# Altium PCB QFN68_DIP72_SMT_PCB.PcbDoc
Units mm, origin at the board's own origin, x right, y up, seen from the top; angles counter-clockwise.
Board outline 35 x 90 mm, 2 copper layers (Top Layer, Bottom Layer); 3 components, 68 nets, 137 pads, 25 vias.
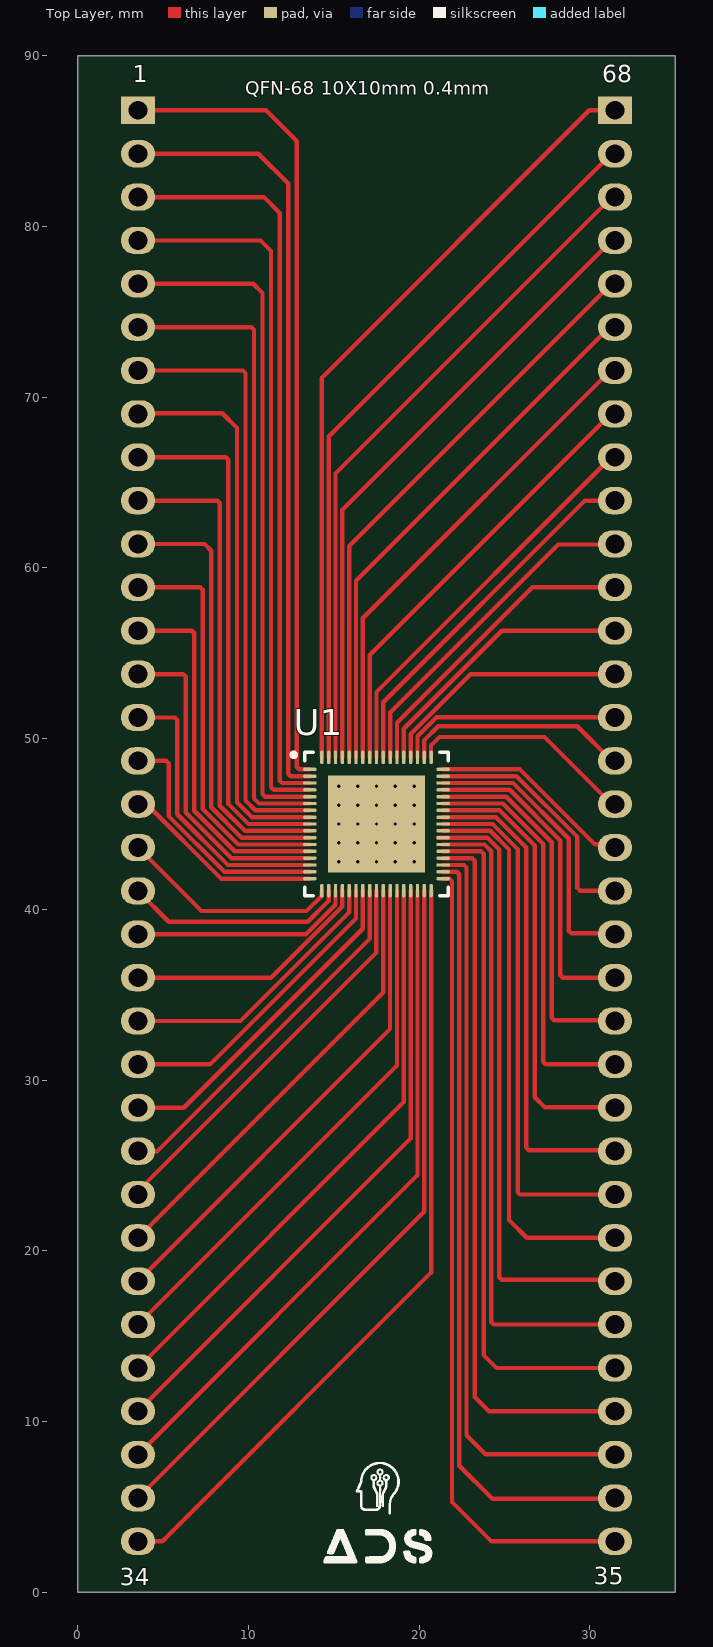
[diagram p0: Top Layer view]
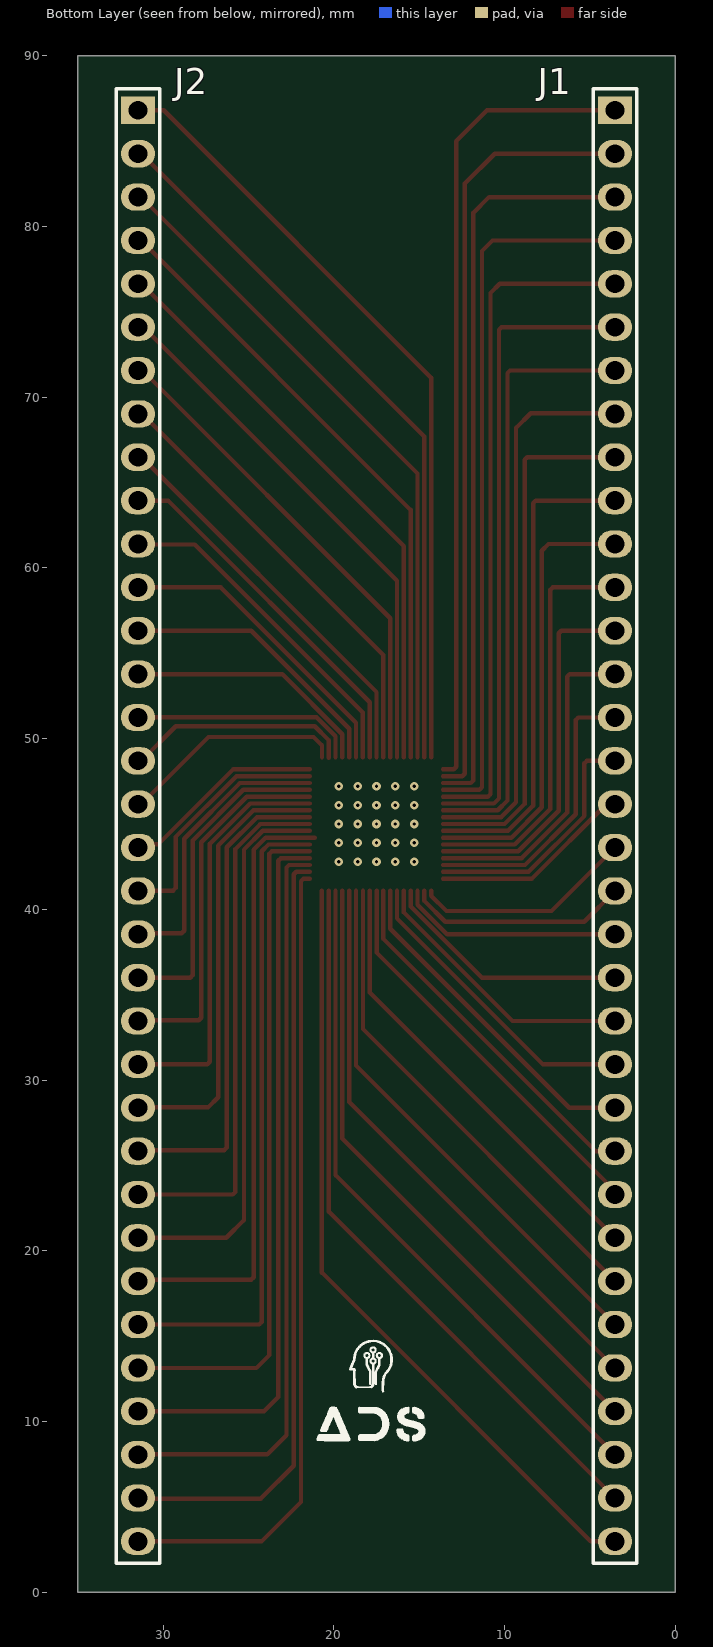
[diagram p1: Bottom Layer view, seen from below]

## Layer stack, top to bottom
Top Solder: solder mask 0.0102, Solder Resist, Dk 3.5
Top Layer: signal copper 0.0356
Dielectric 1: dielectric 0.32, FR-4, Dk 4.8
Bottom Layer: signal copper 0.0356
Bottom Solder: solder mask 0.0102, Solder Resist, Dk 3.5

## Board outline
0,0 35,0 35,90 0,90

## Design rules (kind name [scope] priority, off if disabled: settings)
Clearance Clearance_1 [All] p1 off: gap=0.254 ignorepadtopadclearanceinfootprint=FALSE except(0: Arc-Hole Track-Hole SMDPad-Hole THPad-Hole Via-Hole Fill-Hole Poly-Hole Region-Hole Text-Hole)
Clearance Clearance_QFN68 [All] p2 off: gap=0 ignorepadtopadclearanceinfootprint=TRUE
Clearance [All] p3 off: gap=0.1 ignorepadtopadclearanceinfootprint=TRUE except(0: Arc-Hole Track-Hole SMDPad-Hole THPad-Hole Via-Hole Fill-Hole Poly-Hole Region-Hole Text-Hole)
PolygonConnect [All] p1: connectstyle=Relief reliefconductorwidth=0.254 reliefentries=4 polygonreliefangle="90 Angle" airgapwidth=0.254
RoutingVias [All] p1: holewidth=0.711 width=1.27 viastyle="Through Hole" minholewidth=0.711 minwidth=1.27 maxholewidth=0.711 maxwidth=1.27
SolderMaskExpansion [All] p1: expansion=0.102 istentingtop=FALSE
Width [All] p1: maxlimit=0.254 minlimit=0.254 preferedwidth=0.254
30 further rules are at their usual default settings.

## Components (designator, comment, footprint, x,y, rotation, side; value= is the part's Value field where it differs from the comment)
J1 "HEADER MALE 34PIN" HDR_MALE_1x4_2.54mm 3.53,86.8 r180 bottom
J2 "HEADER MALE 34PIN" HDR_MALE_1x4_2.54mm 31.47,86.8 r180 bottom
U1 "CY8C5888LTQ-LP097" CYP-LTX68_L 17.5,45 r0 top

## Footprints (in the part's own frame and the unit in brackets; to place one, negate y for a bottom-side part, rotate by r counter-clockwise, add the part's x,y. Pads: shape width x height; smd on the part's side, far side on the other; paste and mask are expansions set on the pad)
CYP-LTX68_L [mm] "QFN, 68-Leads, Body 8x8mm, Pitch 0.4mm, Thermal Pad 5.7x5.7mm, IPC High Density"
  oval 0.8x0.2 smd: 1(-3.9,3.2) 2(-3.9,2.8) 3(-3.9,2.4) 4(-3.9,2) 5(-3.9,1.6) 6(-3.9,1.2) 7(-3.9,0.8) 8(-3.9,0.4) 9(-3.9,0) 10(-3.9,-0.4) 11(-3.9,-0.8) 12(-3.9,-1.2) 13(-3.9,-1.6) 14(-3.9,-2) 15(-3.9,-2.4) 16(-3.9,-2.8) 17(-3.9,-3.2) 35(3.9,-3.2) 36(3.9,-2.8) 37(3.9,-2.4) 38(3.9,-2) 39(3.9,-1.6) 40(3.9,-1.2) 41(3.9,-0.8) 42(3.9,-0.4) 43(3.9,0) 44(3.9,0.4) 45(3.9,0.8) 46(3.9,1.2) 47(3.9,1.6) 48(3.9,2) 49(3.9,2.4) 50(3.9,2.8) 51(3.9,3.2)
  oval 0.2x0.8 smd: 18(-3.2,-3.9) 19(-2.8,-3.9) 20(-2.4,-3.9) 21(-2,-3.9) 22(-1.6,-3.9) 23(-1.2,-3.9) 24(-0.8,-3.9) 25(-0.4,-3.9) 26(0,-3.9) 27(0.4,-3.9) 28(0.8,-3.9) 29(1.2,-3.9) 30(1.6,-3.9) 31(2,-3.9) 32(2.4,-3.9) 33(2.8,-3.9) 34(3.2,-3.9) 52(3.2,3.9) 53(2.8,3.9) 54(2.4,3.9) 55(2,3.9) 56(1.6,3.9) 57(1.2,3.9) 58(0.8,3.9) 59(0.4,3.9) 60(0,3.9) 61(-0.4,3.9) 62(-0.8,3.9) 63(-1.2,3.9) 64(-1.6,3.9) 65(-2,3.9) 66(-2.4,3.9) 67(-2.8,3.9) 68(-3.2,3.9)
  rect 5.7x5.7 smd: 69(0,0)
  silkscreen extent -4.97,-4.2 4.2,4.2, body extent -4.05,-4.05 4.05,4.05, height 1
HDR_MALE_1x4_2.54mm [mm] "HDR FEMALE 1x6 2.54mm"
  rect 2x1.6 / inner rect 2x1.2 / far side rect 2x1.6 hole 1.1: 1(0,0)
  oval 2x1.6 / inner oval 2x1.2 / far side oval 2x1.6 hole 1.1: 2(0,-2.54) 3(0,-5.08) 4(0,-7.62) 5(0,-10.16) 6(0,-12.7) 7(0,-15.24) 8(0,-17.78) 9(0,-20.32) 10(0,-22.86) 11(0,-25.4) 12(0,-27.94) 13(0,-30.48) 14(0,-33.02) 15(0,-35.56) 16(0,-38.1) 17(0,-40.64) 18(0,-43.18) 19(0,-45.72) 20(0,-48.26) 21(0,-50.8) 22(0,-53.34) 23(0,-55.88) 24(0,-58.42) 25(0,-60.96) 26(0,-63.5) 27(0,-66.04) 28(0,-68.58) 29(0,-71.12) 30(0,-73.66) 31(0,-76.2) 32(0,-78.74) 33(0,-81.28) 34(0,-83.82)
  silkscreen extent -1.27,-85.09 1.27,1.27, body extent -1.2,-85.09 1.2,1.27, height 10.29

## Part data
J1 J2: library part 77311-101-34LF, "Headers & Wire Housings 34P STR SR TMT HDR .76 AU .425IN LENGTH", Color=Black, Current Rating=3A, Flammability Rating="UL94 V-0", Insulation Resistance=5GR, Manufacturer="Amphenol ICC / FCI", Max Operating Temperature=125°C, Max Voltage Rating (AC)=1.5kV, Min Operating Temperature=-65°C, Package Quantity=100, Supplier Part Number 1=62K8798, Category=Connectors, ComponentLink1Description=https://datasheet.ciiva.com/8050/320503-8050396.pdf?src-supplier=Element14, ComponentLink1URL=https://datasheet.ciiva.com/8050/320503-8050396.pdf?src-supplier=Element14, ComponentLink2Description=https://datasheet.ciiva.com/10116/77311-10116809.pdf?src-supplier=Avnet, ComponentLink2URL=https://datasheet.ciiva.com/10116/77311-10116809.pdf?src-supplier=Avnet, ComponentLink3Description=https://datasheet.ciiva.com/16729/77311-16729755.pdf?src-supplier=Avnet+Europe, ComponentLink3URL=https://datasheet.ciiva.com/16729/77311-16729755.pdf?src-supplier=Avnet+Europe, ComponentLink4Description=https://datasheet.ciiva.com/722/77311-722458.pdf?src-supplier=Digi-Key, ComponentLink4URL=https://datasheet.ciiva.com/722/77311-722458.pdf?src-supplier=Digi-Key, Connector Type="Male Pin", Contact Gender=Male, Contact Material=Bronze, Contact Mating Length=0.23inch, Contact Plating=Gold,GXT, Contact Post Length=2.41mm, Contact Type="Male Pin", Depth=2.4mm, Gender=Male, Housing Color=Black, Housing Material=Thermoplastic, Lead Free="Lead Free", Length=86.36mm, Manufacturer Part Number=77311-101-34LF, Material=Thermoplastic, Mount="Through Hole", Number of Contacts=34, Number of Positions=34, Number of Rows=1, Orientation=Straight, Packaging=Bulk, Pitch=2.54mm, Pricing 1="400=1,25000, 500=1,16000, 1000=1,02000 (USD)", REACH SVHC="No SVHC", RoHS=Yes, Series="BERGSTIK®, MezzSelect™, Basics+", Supplier 1=Newark, Termination=Solder, Voltage Rating=1.5kV
U1: "MCU 32-bit ARM Cortex M3 RISC 256KB Flash 1.8V/3.3V/5V 68-Pin QFN EP Tray", Case/Package=QFN, Frequency=80MHz, Manufacturer=Cypress, Max Operating Temperature=105°C, Min Operating Temperature=-40°C, Supplier Part Number 1=CY8C5888LTQ-LP097-ND, Category=Microcontrollers, ComponentLink1Description=http://www.farnell.com/datasheets/2343841.pdf?src-supplier=Farnell, ComponentLink1URL=http://www.farnell.com/datasheets/2343841.pdf?src-supplier=Farnell, ComponentLink2Description=http://www.mouser.com/ds/2/100/001-84932_PSoC_5LP_CY8C58LP_Family_Datasheet_Progr-1078031.pdf?src-supplier=Mouser, ComponentLink2URL=http://www.mouser.com/ds/2/100/001-84932_PSoC_5LP_CY8C58LP_Family_Datasheet_Progr-1078031.pdf?src-supplier=Mouser, ComponentLink3Description=http://www.cypress.com/?docID=49437&src-supplier=Digi-Key, ComponentLink3URL=http://www.cypress.com/?docID=49437&src-supplier=Digi-Key, Core Architecture=ARM, Interface=I2C,SPI,USB,UART,USART, Manufacturer Part Number=CY8C5888LTQ-LP097, Memory Size=256KB, Memory Type=FLASH, Number of I/Os=38, Oscillator Type=Internal, Packaging=Tray, Peripherals=POR,PWM,WDT,DMA,LCD,CapSense, Pricing 1="1=25,00000, 10=23,12600, 25=21,25080, 80=19,75075, 260=18,12573, 520=17,25069 (USD)", RoHS=Yes, RoHS Compliant=Yes, Stock 1=85, Supplier 1=Digi-Key

## Via types
v1: diameter 0.5, hole 0.2, Top Layer to Bottom Layer, 25 vias

## Nets (pads, with @x,y where several pads share a name; then routed paths per layer and width w, separated by ;. In a path a pad name is that pad's centre, name@x,y a point inside that pad or via, vN(x,y) a via of type N, cw(c..) or ccw(c..) an arc to the next point about the centre after c; other vN are vias at no path point)
NetJ1_1: J1.1 U1.1 | length 47.7
  Top Layer w0.254: J1.1@3.325,86.8 J1.1 11.025,86.8 12.825,85 12.825,48.349 12.974,48.2 U1.1
NetJ1_2: J1.2 U1.2 | length 45.6
  Top Layer w0.254: J1.2@3.325,84.26 J1.2 10.576,84.26 12.325,82.511 12.325,47.949 12.474,47.8 U1.2
NetJ1_3: J1.3 U1.3 | length 44
  Top Layer w0.254: J1.3@3.325,81.72 J1.3 10.905,81.72 11.825,80.8 11.825,47.549 11.974,47.4 U1.3
NetJ1_4: J1.4 U1.4 | length 42
  Top Layer w0.254: J1.4@3.325,79.18 J1.4 10.705,79.18 11.325,78.56 11.325,47.149 11.474,47 U1.4
NetJ1_5: J1.5 U1.5 | length 39.9
  Top Layer w0.254: J1.5@3.325,76.64 J1.5 10.285,76.64 10.825,76.1 10.825,46.749 10.974,46.6 U1.5
NetJ1_6: J1.6 U1.6 | length 37.9
  Top Layer w0.254: J1.6@3.325,74.1 J1.6 10.176,74.1 10.325,73.951 10.325,46.5 10.625,46.2 U1.6
NetJ1_7: J1.7 U1.7 | length 35.4
  Top Layer w0.254: J1.7 9.676,71.56 9.825,71.411 9.825,46.375 10.4,45.8 U1.7
NetJ1_8: J1.8 U1.8 | length 32.9
  Top Layer w0.254: J1.8@3.325,69.02 3.365,69.06 8.465,69.06 9.325,68.2 9.325,46.275 10.2,45.4 U1.8
NetJ1_9: J1.9 U1.9 | length 30.8
  Top Layer w0.254: J1.9 8.676,66.48 8.825,66.331 8.825,46.175 10,45 U1.9
NetJ1_10: J1.10 U1.10 | length 28.5
  Top Layer w0.254: J1.10 8.176,63.94 8.325,63.791 8.325,46.075 9.8,44.6 U1.10
NetJ1_11: J1.11 U1.11 | length 26
  Top Layer w0.254: J1.11 7.425,61.4 7.825,61 7.825,45.975 9.6,44.2 U1.11
NetJ1_12: J1.12 U1.12 | length 23.8
  Top Layer w0.254: J1.12 7.176,58.86 7.325,58.711 7.325,45.875 9.4,43.8 U1.12
NetJ1_13: J1.13 U1.13 | length 21.5
  Top Layer w0.254: J1.13 6.676,56.32 6.825,56.171 6.825,45.775 9.2,43.4 U1.13
NetJ1_14: J1.14 U1.14 | length 19.2
  Top Layer w0.254: J1.14 6.176,53.78 6.325,53.631 6.325,45.675 9,43 U1.14
NetJ1_15: J1.15 U1.15 | length 16.9
  Top Layer w0.254: J1.15 5.676,51.24 5.825,51.091 5.825,45.575 8.8,42.6 U1.15
NetJ1_16: J1.16 U1.16 | length 14.6
  Top Layer w0.254: J1.16 5.176,48.7 5.325,48.551 5.325,45.475 8.6,42.2 U1.16
NetJ1_17: J1.17 U1.17 | length 11.9
  Top Layer w0.254: J1.17 4.04,46.16 8.4,41.8 U1.17
NetJ1_18: J1.18 U1.18 | length 13
  Top Layer w0.254: J1.18@3.525,43.62 7.245,39.9 13.4,39.9 14.3,40.8 U1.18
NetJ1_19: J1.19 U1.19 | length 13
  Top Layer w0.254: J1.19@3.525,41.08 5.33,39.275 13.475,39.275 14.695,40.495 U1.19@14.695,41.095
NetJ1_20: J1.20 U1.20 | length 13.3
  Top Layer w0.254: J1.20@3.325,38.54 13.365,38.54 15.095,40.27 U1.20@15.095,41.095
NetJ1_21: J1.21 U1.21 | length 14.8
  Top Layer w0.254: J1.21@3.325,36 11.325,36 15.495,40.17 U1.21@15.495,41.095
NetJ1_22: J1.22 U1.22 | length 16.5
  Top Layer w0.254: J1.22@3.325,33.46 9.535,33.46 15.895,39.82 U1.22@15.895,41.095
NetJ1_23: J1.23 U1.23 | length 18.1
  Top Layer w0.254: J1.23@3.325,30.92 7.745,30.92 16.295,39.47 U1.23@16.295,41.095
NetJ1_24: J1.24 U1.24 | length 19.9
  Top Layer w0.254: J1.24@3.325,28.38 6.205,28.38 16.695,38.87 U1.24@16.695,41.095
NetJ1_25: J1.25 U1.25 | length 21.7
  Top Layer w0.254: J1.25@3.325,25.84 4.665,25.84 17.095,38.27 U1.25@17.095,41.095
NetJ1_26: J1.26 U1.26 | length 23.7
  Top Layer w0.254: J1.26@3.325,23.3 17.495,37.47 U1.26@17.495,41.095
NetJ1_27: J1.27 U1.27 | length 26.3
  Top Layer w0.254: J1.27@3.525,20.76 17.895,35.13 U1.27@17.895,41.095
NetJ1_28: J1.28 U1.28 | length 29
  Top Layer w0.254: J1.28@3.525,18.22 18.295,32.99 U1.28@18.295,41.095
NetJ1_29: J1.29 U1.29 | length 31.7
  Top Layer w0.254: J1.29@3.525,15.68 18.7,30.855 U1.29
NetJ1_30: J1.30 U1.30 | length 34.4
  Top Layer w0.254: J1.30@3.525,13.14 19.1,28.715 U1.30
NetJ1_31: J1.31 U1.31 | length 37.1
  Top Layer w0.254: J1.31@3.525,10.6 19.5,26.575 U1.31
NetJ1_32: J1.32 U1.32 | length 39.8
  Top Layer w0.254: J1.32@3.525,8.06 19.9,24.435 U1.32
NetJ1_33: J1.33 U1.33 | length 42.5
  Top Layer w0.254: J1.33@3.525,5.52 20.3,22.295 U1.33
NetJ1_34: J1.34 U1.34 | length 46.3
  Top Layer w0.254: J1.34@3.325,2.98 4.955,2.98 20.7,18.725 U1.34
NetJ2_1: J2.1 U1.68 | length 45.7
  Top Layer w0.254: U1.68 14.3,71.144 29.956,86.8 J2.1@31.265,86.8
NetJ2_2: J2.2 U1.67 | length 42.2
  Top Layer w0.254: U1.67 14.7,67.695 J2.2@31.265,84.26
NetJ2_3: J2.3 U1.66 | length 39.5
  Top Layer w0.254: U1.66 15.1,65.525 31.265,81.69 J2.3@31.265,81.72
NetJ2_4: J2.4 U1.65 | length 36.8
  Top Layer w0.254: U1.65 15.5,63.4 31.265,79.165 J2.4@31.265,79.18
NetJ2_5: J2.5 U1.64 | length 34.1
  Top Layer w0.254: U1.64 15.9,61.275 J2.5@31.265,76.64
NetJ2_6: J2.6 U1.63 | length 31.5
  Top Layer w0.254: U1.63 16.3,59.25 31.15,74.1 J2.6@31.265,74.1
NetJ2_7: J2.7 U1.62 | length 28.7
  Top Layer w0.254: U1.62 16.7,57.05 31.21,71.56 J2.7@31.265,71.56
NetJ2_8: J2.8 U1.61 | length 26
  Top Layer w0.254: U1.61 17.1,54.9 31.22,69.02 J2.8@31.265,69.02
NetJ2_9: J2.9 U1.60 | length 23.3
  Top Layer w0.254: U1.60 17.5,52.725 31.255,66.48 J2.9@31.265,66.48
NetJ2_10: J2.10 U1.59 | length 21.5
  Top Layer w0.254: U1.59 17.9,52.135 29.69,63.925 31.25,63.925 J2.10@31.265,63.94
NetJ2_11: J2.11 U1.58 | length 19.7
  Top Layer w0.254: U1.58 18.3,51.535 28.14,61.375 31.24,61.375 J2.11@31.265,61.4
NetJ2_12: J2.12 U1.57 | length 17.9
  Top Layer w0.254: U1.57 18.7,50.935 26.625,58.86 J2.12@31.265,58.86
NetJ2_13: J2.13 U1.56 | length 16.2
  Top Layer w0.254: U1.56 19.1,50.585 24.84,56.325 31.26,56.325 J2.13@31.265,56.32
NetJ2_14: J2.14 U1.55 | length 14.6
  Top Layer w0.254: U1.55 19.5,50.254 23.026,53.78 J2.14@31.265,53.78
NetJ2_15: J2.15 U1.54 | length 13.1
  Top Layer w0.254: U1.54 19.9,50.135 21.015,51.25 31.255,51.25 J2.15@31.265,51.24
NetJ2_16: J2.16 U1.53 | length 13.2
  Top Layer w0.254: U1.53@20.305,48.88 20.305,49.915 21.115,50.725 29.26,50.725 31.265,48.72 J2.16@31.265,48.7
NetJ2_17: J2.17 U1.52 | length 13.1
  Top Layer w0.254: U1.52@20.695,48.905 20.695,49.605 21.19,50.1 27.343,50.1 J2.17@31.265,46.178
NetJ2_18: J2.18 U1.51 | length 11.8
  Top Layer w0.254: U1.51 25.9,48.2 30.294,43.806 31.079,43.806 J2.18@31.265,43.62
NetJ2_19: J2.19 U1.50 | length 14.4
  Top Layer w0.254: U1.50 25.7,47.8 29.265,44.235 29.265,41.249 29.414,41.1 31.245,41.1 J2.19@31.265,41.08
NetJ2_20: J2.20 U1.49 | length 16.7
  Top Layer w0.254: U1.49 25.5,47.4 28.765,44.135 28.765,38.749 28.914,38.6 31.205,38.6 J2.20@31.265,38.54
NetJ2_21: J2.21 U1.48 | length 19
  Top Layer w0.254: U1.48 25.3,47 28.265,44.035 28.265,36.149 28.414,36 J2.21@31.265,36
NetJ2_22: J2.22 U1.47 | length 21.3
  Top Layer w0.254: U1.47 25.1,46.6 27.765,43.935 27.765,33.649 27.914,33.5 31.225,33.5 J2.22@31.265,33.46
NetJ2_23: J2.23 U1.46 | length 23.7
  Top Layer w0.254: U1.46 24.9,46.2 27.265,43.835 27.265,31.069 27.414,30.92 J2.23@31.265,30.92
NetJ2_24: J2.24 U1.45 | length 25.7
  Top Layer w0.254: U1.45 24.7,45.8 26.765,43.735 26.765,29 27.365,28.4 31.245,28.4 J2.24@31.265,28.38
NetJ2_25: J2.25 U1.44 | length 28.3
  Top Layer w0.254: U1.44 24.5,45.4 26.265,43.635 26.265,26.049 26.414,25.9 31.205,25.9 J2.25@31.265,25.84
NetJ2_26: J2.26 U1.43 | length 30.6
  Top Layer w0.254: U1.43 24.3,45 25.765,43.535 25.765,23.449 25.914,23.3 J2.26@31.265,23.3
NetJ2_27: J2.27 U1.42 | length 32.5
  Top Layer w0.254: U1.42 24.165,44.6 25.265,43.5 25.265,21.8 26.305,20.76 J2.27@31.265,20.76
NetJ2_28: J2.28 U1.41 | length 35.6
  Top Layer w0.254: U1.41@21.125,44.2 U1.41 23.995,44.2 24.695,43.5 24.695,18.449 24.844,18.3 31.185,18.3 J2.28@31.265,18.22
NetJ2_29: J2.29 U1.40 | length 37.7
  Top Layer w0.254: U1.40 23.825,43.8 24.225,43.4 24.225,15.829 24.374,15.68 J2.29@31.265,15.68
NetJ2_30: J2.30 U1.39 | length 39.6
  Top Layer w0.254: U1.39 23.626,43.4 23.775,43.251 23.775,13.9 24.535,13.14 J2.30@31.265,13.14
NetJ2_31: J2.31 U1.38 | length 41.7
  Top Layer w0.254: U1.38 23.101,43 23.25,42.851 23.25,11.44 24.09,10.6 J2.31@31.265,10.6
NetJ2_32: J2.32 U1.37 | length 43.7
  Top Layer w0.254: U1.37 22.626,42.6 22.775,42.451 22.775,9.2 23.9,8.075 31.25,8.075 J2.32@31.265,8.06
NetJ2_33: J2.33 U1.36 | length 45.4
  Top Layer w0.254: U1.36 22.201,42.2 22.35,42.051 22.35,7.414 24.289,5.475 31.22,5.475 J2.33@31.265,5.52
NetJ2_34: J2.34 U1.35 | length 47.2
  Top Layer w0.254: U1.35 21.776,41.8 21.925,41.651 21.925,5.29 24.235,2.98 J2.34@31.265,2.98
pads on no net: U1.69
copper on no net:
  other v1: 15.3,42.8 16.4,42.8 17.5,42.8 18.6,42.8 19.7,42.8 15.3,43.9 16.4,43.9 17.5,43.9 18.6,43.9 19.7,43.9 15.3,45 16.4,45 17.5,45 18.6,45 19.7,45 15.3,46.1 16.4,46.1 17.5,46.1 18.6,46.1 19.7,46.1 15.3,47.2 16.4,47.2 17.5,47.2 18.6,47.2 19.7,47.2

## Silkscreen, mask and mechanical layers (free items; w line width, h text height)
Top Overlay:
  drawing of 8 lines, arcs and shapes, not listed
  text "QFN-68 10X10mm 0.4mm" at 9.8,87.7 h0.8
  text "35" at 30.225,0.475 h1
  text "34" at 2.475,0.4 h1
Bottom Overlay:
  drawing of 8 lines, arcs and shapes, not listed

## Text inside footprints (layer, text, board x,y; h text height)
J1: Top Overlay "1" at 3.23,88.45 h1
J2: Top Overlay "68" at 30.73,88.45 h1